# Altium PCB eSolderControl_v3.PcbDoc
Units mm, origin at the board's own origin, x right, y up, seen from the top; angles counter-clockwise.
Board outline 74.05 x 60.21 mm, 2 copper layers (Top Layer, Bottom Layer); 45 components, 44 nets, 228 pads, 74 vias.
Unrouted connection lines stored in the file: 1.
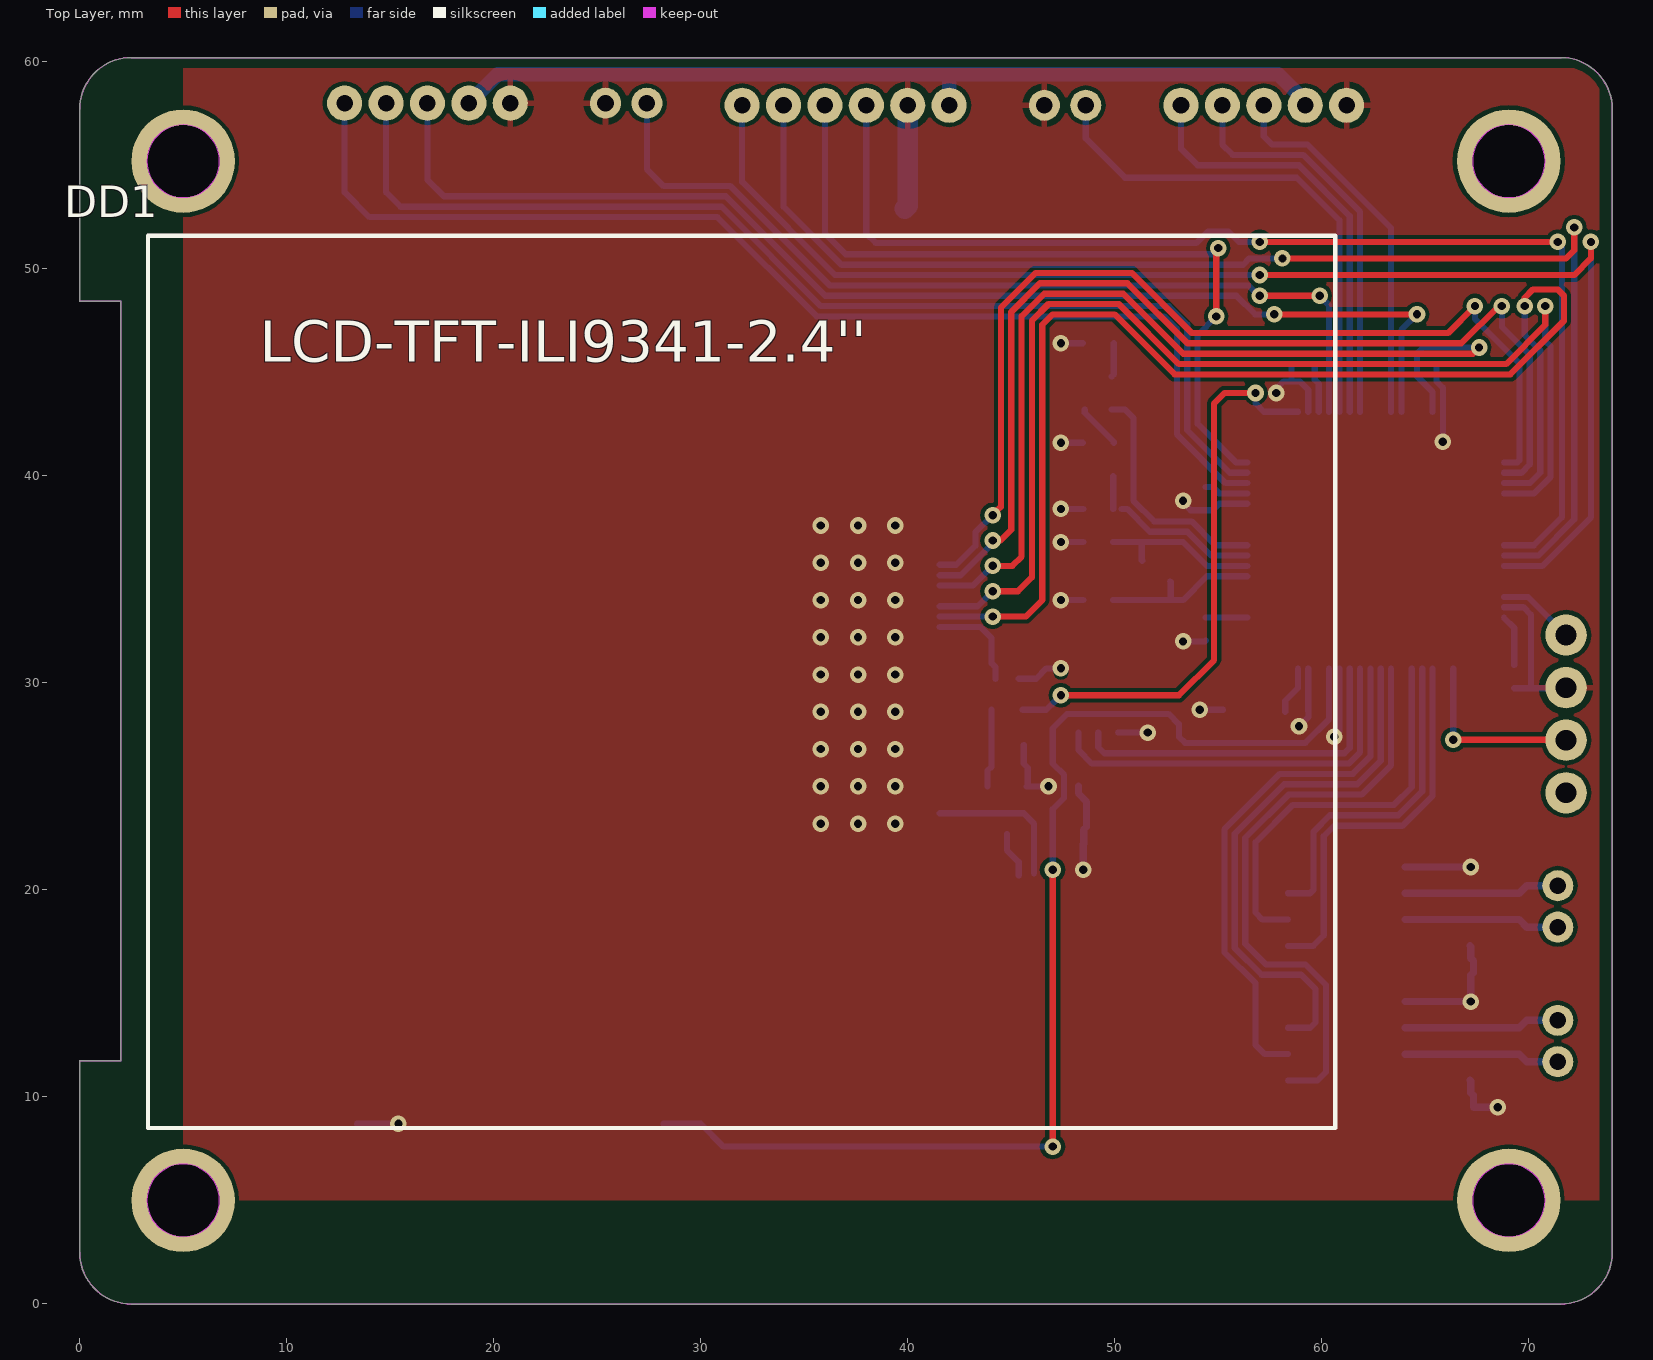
[diagram p0: Top Layer view]
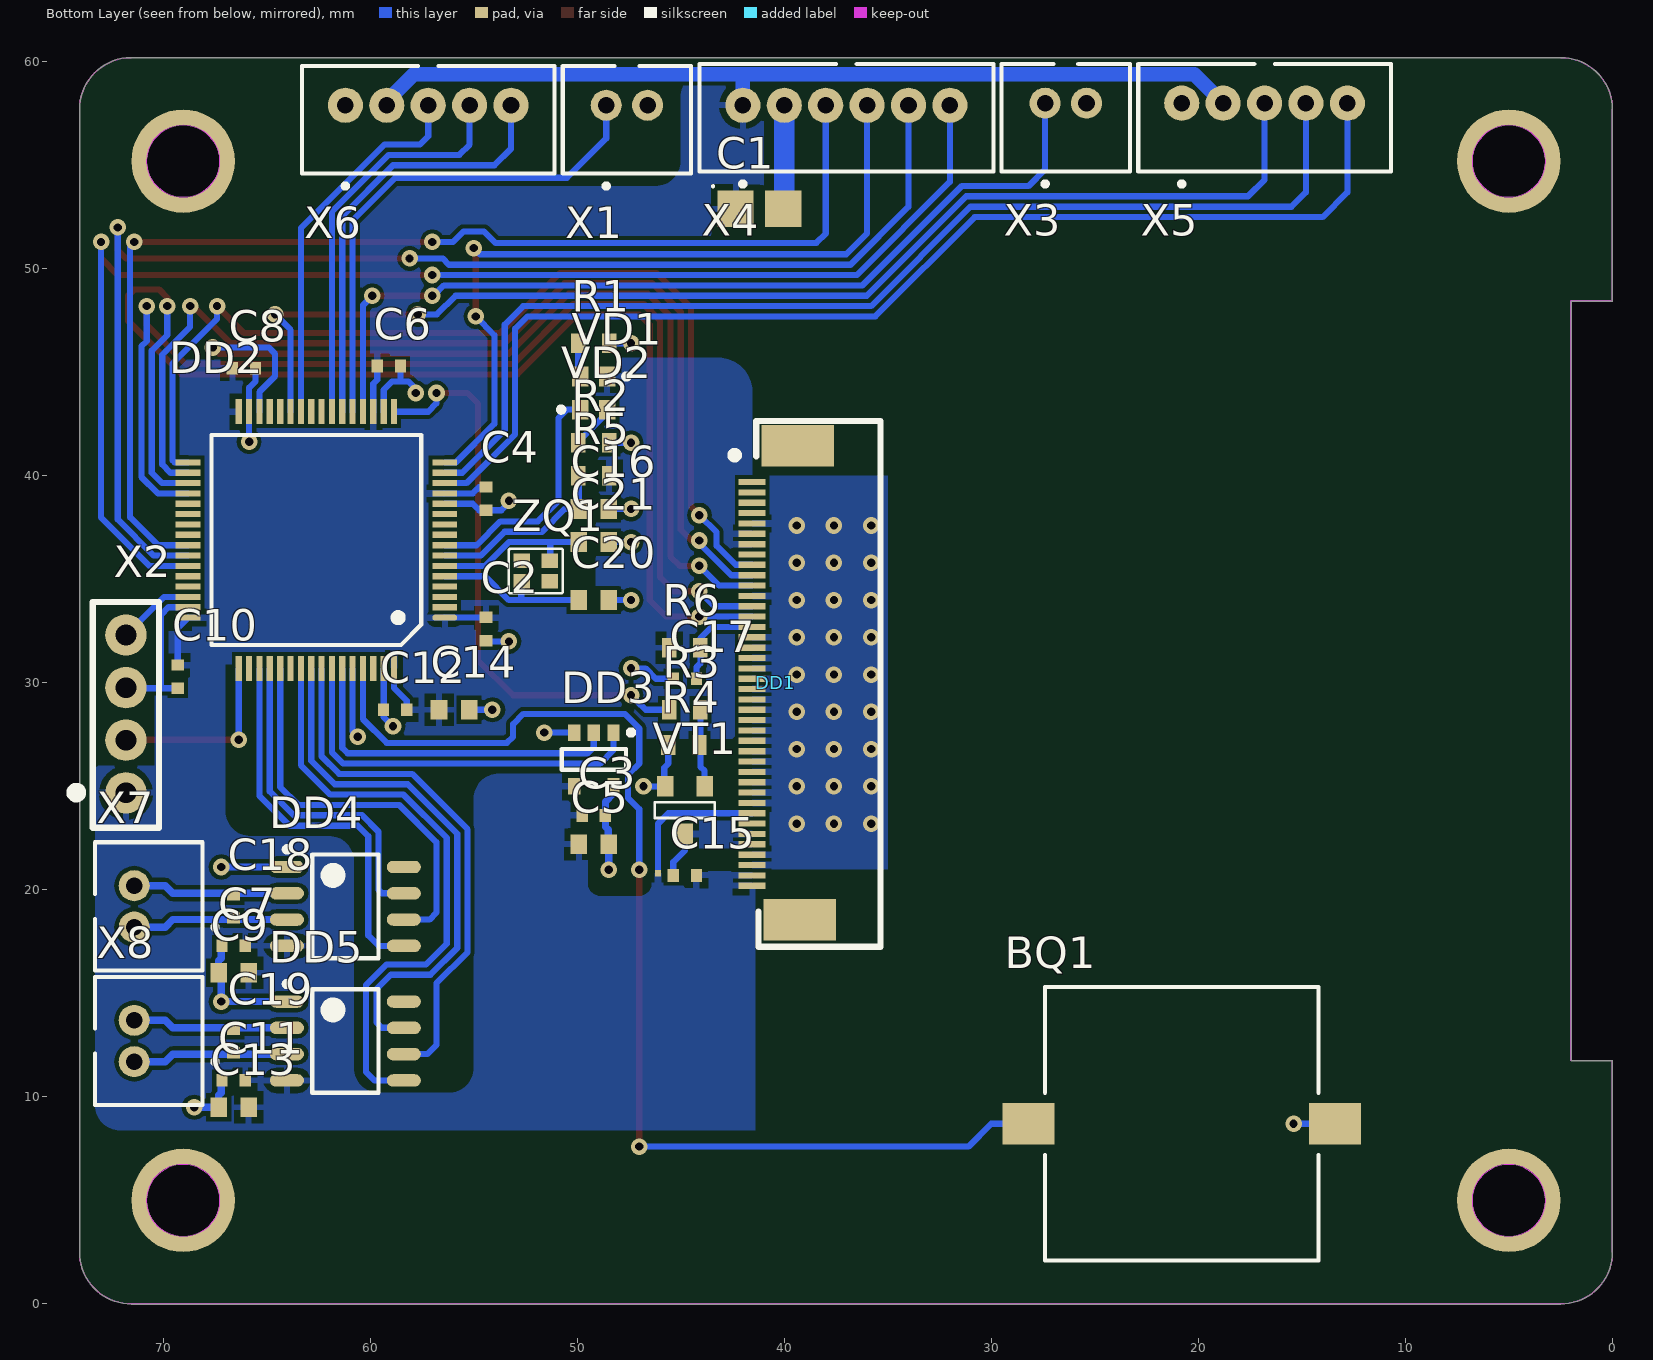
[diagram p1: Bottom Layer view, seen from below]

## Layer stack, top to bottom
Top Solder: solder mask 0.0102, Solder Resist, Dk 3.5
Top Layer: signal copper 0.0356
Dielectric 1: dielectric 0.32, FR-4, Dk 4.8
Bottom Layer: signal copper 0.0356
Bottom Solder: solder mask 0.0102, Solder Resist, Dk 3.5

## Board outline
-0.007,2.5 -0.007,11.75 cw(c0,11.75) 0,11.757 1.993,11.757 1.993,48.443 0,48.443 cw(c0,48.45) -0.007,48.45 -0.007,57.7 cw(c2.5,57.7) 2.5,60.207 71.573,60.207 cw(c71.573,60.2) 71.575,60.206 cw(c71.536,57.7) 74.043,57.7 74.043,2.5 cw(c71.536,2.5) 71.536,-0.007 2.5,-0.007 cw(c2.5,2.5)

## Design rules (kind name [scope] priority, off if disabled: settings)
BoardOutlineClearance [All] p1: gap=0.4 ignorepadtopadclearanceinfootprint=FALSE
Clearance [All] p1: gap=0.2 ignorepadtopadclearanceinfootprint=FALSE except(0.3: Arc-Arc Arc-Track Track-Track)
DiffPairsRouting [All] p1: maxlimit=0.7 minlimit=0.5 mostfreqgap=0.5 toplayer_minwidth=0.35 toplayer_maxwidth=0.5 toplayer_prefwidth=0.35 bottomlayer_minwidth=0.35 bottomlayer_maxwidth=0.5 bottomlayer_prefwidth=0.35 maxuncoupledlength=12.7
HoleSize [All] p1: absolutevalues=TRUE maxlimit=6.3 minlimit=0.3 maxpercent=80.000 minpercent=20.000
HoleToHoleClearance [All] p1: gap=0.3 allowstackedmicrovias=TRUE
PolygonConnect [All] p1: thpad.connectstyle=Relief thpad.reliefconductorwidth=0.3 thpad.reliefentries=4 thpad.polygonreliefangle="90 Angle" thpad.airgapwidth=0.3 smdpad.connectstyle=Relief smdpad.reliefconductorwidth=0.3 smdpad.reliefentries=4 smdpad.polygonreliefangle="90 Angle" smdpad.airgapwidth=0.3 via.connectstyle=Direct via.reliefconductorwidth=0.254 via.reliefentries=4 via.polygonreliefangle="90 Angle" via.airgapwidth=0.254
RoutingVias [All] p1: holewidth=0.4 width=0.8 viastyle="Through Hole" minholewidth=0.3 minwidth=0.6 maxholewidth=6.3 maxwidth=10
SilkToSilkClearance [All] p1: silktosilkclearance=0.2
SilkToSolderMaskClearance [IsPad] p1: minsilkscreentomaskgap=0.2 clearancetoexposedcopper=TRUE
SolderMaskExpansion [All] p1: expansion=0.15
Width [All] p1: maxlimit=1 minlimit=0.2 preferedwidth=0.35
25 further rules are at their usual default settings.

## Classes and differential pairs
differential pair T_SOLDER: +T_SOLDER_P -T_SOLDER_N
differential pair T_DRY: +T_DRY_P -T_DRY_N

## Components (designator, comment, footprint, x,y, rotation, side; value= is the part's Value field where it differs from the comment)
BQ1 "HPS13C" HPS13C 20.8,8.7 r90 bottom
C1 "10u" CAP_TYPE_A 41.2,52.9 r180 bottom
C2 "0.1u" C0402 54.4,32.6 r90 bottom
C3 "0.1u" C0402 49.2,23.6 r0 bottom
C4 "0.1u" C0402 54.4,38.9 r90 bottom
C5 "4.7u" C0603 49.2,22.2 r0 bottom
C6 "0.1u" C0402 59.1,45.3 r180 bottom
C7 "0.1u" C0402 66.6,17.3 r180 bottom
C8 "0.1u" C0402 66.1,45.2 r0 bottom
C9 "4.7u" C0603 66.6,16 r180 bottom
C10 "0.1u" C0402 69.3,30.3 r90 bottom
C11 "0.1u" C0402 66.6,10.8 r180 bottom
C12 "0.1u" C0402 58.8,28.7 r180 bottom
C13 "4.7u" C0603 66.6,9.5 r180 bottom
C14 "4.7u" C0603 55.952,28.7 r0 bottom
C15 "0.1u" C0402 44.8,20.7 r0 bottom
C16 "1u" C0603 49.2,38.4 r180 bottom
C17 "0.1u" C0402 44.8,30.2 r0 bottom
C18 "10n" C0402 66.6,19.2 r270 bottom
C19 "10n" C0402 66.6,12.7 r270 bottom
C20 "6p" C0603 49.2,34 r0 bottom
C21 "6p" C0603 49.2,36.8 r0 bottom
DD1 "ILI9341" ili9341-2.4'' 40.4,30 r90 top locked
DD2 "STM32F105RBTx" LQFP64 62.6,36.9 r0 bottom locked
DD3 "24AA08" SOT95P245X145-5N 49.2,26.3 r270 bottom
DD4 "MAX6675" SOIC127P600X175-8N 61.2,19.2 r180 bottom
DD5 "MAX6675" SOIC127P600X175-8N 61.2,12.7 r180 bottom
R1 "200" R0603 49.2,46.4 r180 bottom
R2 "200" R0603 49.2,41.6 r180 bottom
R3 "1K" R0603 44.8,28.7 r180 bottom
R4 "10K" R0603 44.85,27 r180 bottom
R5 "1K" R0603 49.2,40 r0 bottom
R6 "1K" R0603 44.8,31.7 r180 bottom
VD1 "*" "LED 0603_Green" 49.2,44.8 r0 bottom value="0603 green"
VD2 "*" "LED 0603_RED" 49.2,43.2 r180 bottom value=0603red
VT1 "IRLML0010" SOT23-3 44.8,23.85 r270 bottom
X1 "DS1066-02M" DS1066-02M 47.6,57.2 r180 bottom
X2 "PLS-4" PLS-4 71.8,28.5 r90 bottom
X3 "DS1066-02M" DS1066-02M 26.4,57.3 r180 bottom
X4 "DS1066-06M" DS1066-06M 37,57.3 r180 bottom
X5 "DS1066-05M" DS1066-05M 16.8,57.3 r180 bottom
X6 "DS1066-05M" DS1066-05M 57.2,57.2 r180 bottom
X7 "DS1066-02M" DS1066-02M 70.7,19.2 r90 bottom
X8 "DS1066-02M" DS1066-02M 70.7,12.7 r90 bottom
ZQ1 "24MHz" XRCGB_F_Z 52,35.4 r180 bottom

## Footprints (in the part's own frame and the unit in brackets; to place one, negate y for a bottom-side part, rotate by r counter-clockwise, add the part's x,y. Pads: shape width x height; smd on the part's side, far side on the other; paste and mask are expansions set on the pad)
C0402 [mm] "Chip Capacitor, 2-Leads, Body 1,00x0,50mm, IPC Medium Density"
  rect 0.55x0.62 smd: 1(-0.56,0) 2(0.56,0)
  body extent -0.53,-0.28 0.53,0.27, height 0.55
C0603 [mm] "Chip Capacitor, 2-Leads, Body 1,60x0,80mm, IPC Medium Density"
  rect 0.8x0.95 smd: 1(-0.725,0) 2(0.725,0)
  body extent -0.85,-0.45 0.85,0.45, height 0.9
CAP_TYPE_A [mm] "Chip Capacitor, 2-Leads, Body 3,20x1,60mm, IPC Medium Density"
  rect 1.75x1.75 smd: 1(-1.15,0) 2(1.15,0)
  silkscreen extent -2.29,1.04 -2.19,1.14, body extent -1.7,-0.9 1.7,0.9, height 1.8
DS1066-02M [mm] "step 2mm"
  round 1.5 hole 0.8 mask+0.15: 1(-1,0.7) 2(1,0.7)
  silkscreen extent -3.1,-3.3 3.1,2.6, body extent -3,-2.2 3,2.3, height 6
DS1066-05M [mm] "step 2mm"
  round 1.7 hole 0.8: 1(-4,0.7) 2(-2,0.7) 3(0,0.7) 4(2,0.7) 5(4,0.7)
  silkscreen extent -6.1,-3.3 6.1,2.6
DS1066-06M [mm] "step 2mm"
  round 1.7 hole 0.8: 1(-5,0.6) 2(-3,0.6) 3(-1,0.6) 4(1,0.6) 5(3,0.6) 6(5,0.6)
  silkscreen extent -7.1,-3.3 7.1,2.6, body extent -7,-2.1 7,2.4, height 6
HPS13C [mm]
  rect 2x2.5 smd: 1(0,7.4) 2(0,-7.4)
  silkscreen extent -6.6,-6.6 6.6,6.6, body extent -6.4,-6.4 6.4,6.4, height 2.5
ili9341-2.4'' [mm] "ili9341-40pin"
  rect 2x3.5 smd far side: 0(-11.45,1.15) 0(11.45,1.05)
  rect 0.3x1.3 smd far side: 1(9.7,-1.15) 2(9.2,-1.15) 3(8.7,-1.15) 4(8.2,-1.15) 5(7.7,-1.15) 6(7.2,-1.15) 7(6.7,-1.15) 8(6.2,-1.15) 9(5.7,-1.15) 10(5.2,-1.15) 11(4.7,-1.15) 12(4.2,-1.15) 13(3.7,-1.15) 14(3.2,-1.15) 15(2.7,-1.15) 16(2.2,-1.15) 17(1.7,-1.15) 18(1.2,-1.15) 19(0.7,-1.15) 20(0.2,-1.15) 21(-0.3,-1.15) 22(-0.8,-1.15) 23(-1.3,-1.15) 24(-1.8,-1.15) 25(-2.3,-1.15) 26(-2.8,-1.15) 27(-3.3,-1.15) 28(-3.8,-1.15) 29(-4.3,-1.15) 30(-4.8,-1.15) 31(-5.3,-1.15) 32(-5.8,-1.15) 33(-6.3,-1.15) 34(-6.8,-1.15) 35(-7.3,-1.15) 36(-7.8,-1.15) 37(-8.3,-1.15) 38(-8.8,-1.15) 39(-9.3,-1.15) 40(-9.8,-1.15)
  silkscreen extent -21.5,-20.25 21.6,37.1, body extent -21.3,-20.1 21.4,41.3, height 3.45
"LED 0603_Green" [mm] "Chip LED, 2-Leads, Body 1,60x0,85mm, IPC Medium Density"
  rect 0.8x0.95 smd: 1(-0.65,0) 2(0.65,0)
  silkscreen extent -1.67,-0.1 -1.48,0.1, body extent -0.8,-0.4 0.8,0.4, height 0.6
"LED 0603_RED" [mm] "Chip LED, 2-Leads, Body 1,60x0,85mm, IPC Medium Density"
  rect 0.8x0.95 smd: 1(-0.65,0) 2(0.65,0)
  silkscreen extent -1.68,-0.1 -1.48,0.1, body extent -0.8,-0.4 0.8,0.4, height 0.6
LQFP64 [mm]
  oval 1.2x0.3 smd: 1(-6.2,3.75)
  rect 1.2x0.3 smd: 2(-6.2,3.25) 3(-6.2,2.75) 4(-6.2,2.25) 5(-6.2,1.75) 6(-6.2,1.25) 7(-6.2,0.75) 8(-6.2,0.25) 9(-6.2,-0.25) 10(-6.2,-0.75) 11(-6.2,-1.25) 12(-6.2,-1.75) 13(-6.2,-2.25) 14(-6.2,-2.75) 15(-6.2,-3.25) 16(-6.2,-3.75) 33(6.2,-3.75) 34(6.2,-3.25) 35(6.2,-2.75) 36(6.2,-2.25) 37(6.2,-1.75) 38(6.2,-1.25) 39(6.2,-0.75) 40(6.2,-0.25) 41(6.2,0.25) 42(6.2,0.75) 43(6.2,1.25) 44(6.2,1.75) 45(6.2,2.25) 46(6.2,2.75) 47(6.2,3.25) 48(6.2,3.75)
  rect 0.3x1.2 smd: 17(-3.75,-6.2) 18(-3.25,-6.2) 19(-2.75,-6.2) 20(-2.25,-6.2) 21(-1.75,-6.2) 22(-1.25,-6.2) 23(-0.75,-6.2) 24(-0.25,-6.2) 25(0.25,-6.2) 26(0.75,-6.2) 27(1.25,-6.2) 28(1.75,-6.2) 29(2.25,-6.2) 30(2.75,-6.2) 31(3.25,-6.2) 32(3.75,-6.2) 49(3.75,6.2) 50(3.25,6.2) 51(2.75,6.2) 52(2.25,6.2) 53(1.75,6.2) 54(1.25,6.2) 55(0.75,6.2) 56(0.25,6.2) 57(-0.25,6.2) 58(-0.75,6.2) 59(-1.25,6.2) 60(-1.75,6.2) 61(-2.25,6.2) 62(-2.75,6.2) 63(-3.25,6.2) 64(-3.75,6.2)
  silkscreen extent -5.06,-5.06 5.06,5.06, body extent -6,-6 6,6, height 1.6
PLS-4 [mm] "PLS 2.54mm pitch"
  round 2 hole 1: 1(-3.81,0) 2(-1.27,0) 3(1.27,0) 4(3.81,0)
  silkscreen extent -5.5,-1.6 5.4,2.62, body extent -5.08,-1.27 5.08,1.27, height 8.44
R0603 [mm] "Chip Resistor, 2-Leads, Body 1,60x0,85mm, IPC Medium Density"
  rect 0.7x0.95 smd: 1(-0.75,0) 2(0.75,0)
  body extent -0.8,-0.4 0.8,0.4, height 0.4
SOIC127P600X175-8N [mm] "SOIC, 8-Leads, Body 4,90x3,90mm, Pitch 1,27mm, IPC Medium Density"
  oval 1.65x0.6 smd: 1(-2.825,1.905) 2(-2.825,0.635) 3(-2.825,-0.635) 4(-2.825,-1.905) 5(2.825,-1.905) 6(2.825,-0.635) 7(2.825,0.635) 8(2.825,1.905)
  silkscreen extent -2.95,-2.5 1.6,2.88, body extent -3,-2.45 3,2.45, height 1.7
SOT23-3 [mm] "SOT23, 3 pin"
  round 0.5 on Mech16: 0(0,0)
  rect 1x0.8 smd: 1(-1.15,0.95) 2(-1.15,-0.95) 3(1.15,0)
  silkscreen extent -0.38,-1.45 0.38,1.45, body extent -1.4,-1.45 1.4,1.45, height 1.29
SOT95P245X145-5N [mm] "SOT23, 5-Leads, Body 2,90x2,45mm, Pitch 0,95mm, IPC Medium Density"
  rect 0.8x0.6 smd: 1(-1.3,0.95) 2(-1.3,0) 3(-1.3,-0.95) 4(1.3,-0.95) 5(1.3,0.95)
  silkscreen extent -1.42,-1.55 0.5,1.92, body extent -1.25,-1.5 1.25,1.5, height 1.05
XRCGB_F_Z [mm] "smd 2x1.6 mm crystal resonator"
  rect 0.8x0.7 smd: 1(-0.675,-0.5) 2(0.675,-0.5) 3(0.675,0.5) 4(-0.675,0.5)
  silkscreen extent -1.3,-1.07 1.3,1.07, body extent -1,-0.8 1,0.8, height 0.65

## Part data
BQ1: library part Buzzer, Name=HPS13C
C1: library part Capasitor(Pol), Name="TECAP 10/10V"
C2 C3 C4 C5 C6 C7 C8 C9 C10 C11 C12 C13 C14 C15 C16 C17 C18 C19 C20 C21: library part Capasitor
  C16 C17: Other=Космодром
  C20 C21: Other=Алиэкспрес
DD1: library part ili9341
DD3: "8K I2C Serial EEPROM", Name=24AA08
DD4 DD5: library part MAX31855/6675, Name=MAX6675
R1 R2 R3 R4 R5 R6: library part Resistor
VD1 VD2: library part LED
VT1: library part "N-channel MOSFET", "N-channel MOSFET", Name=IRLML0010
X1 X3 X7 X8: library part 2-PIN, Name=DS1066-02M
X2: library part 4-PIN, Name=PLS-4
X4: library part 6-PIN, Name=DS1066-06M
X5 X6: library part 5-PIN, Name=DS1066-05M
ZQ1: library part Resonator, Name=XRCGB_F_Z
DD2: Name=STM32F105RBTx

## Free pads (board coordinates)
  round 5 hole 3.5: 0(5,5) 0(5,55.2) 0(69.036,5) 0(69.036,55.2)
  rect 0.3x0.3 smd far side: 4(46.1,20.8)

## Via types
v1: diameter 0.8, hole 0.4, Top Layer to Bottom Layer, tented both sides, 57 vias
v2: diameter 0.8, hole 0.4, Top Layer to Bottom Layer, 17 vias

## Nets (pads, with @x,y where several pads share a name; then routed paths per layer and width w, separated by ;. In a path a pad name is that pad's centre, name@x,y a point inside that pad or via, vN(x,y) a via of type N, cw(c..) or ccw(c..) an arc to the next point about the centre after c; other vN are vias at no path point)
3.3V: C1.1 C2.2 C3.2 C4.2 C5.2 C6.1 C7.2 C8.2 C9.2 C10.2 C11.2 C12.2 C13.2 C14.2 C15.1 DD1.6 DD1.7 DD1.33 DD1.39 DD1.40 DD2.1 DD2.13 DD2.19 DD2.32 DD2.48 DD2.64 DD3.4 DD4.4 DD5.4 pad.4 R5.1 R6.1 VD1.1 X2.1 X4.1 X5.2 X6.2 | length 61.6
  Bottom Layer w0.3: DD1.33 45.6,23.7 46.1,23.2 pad.4 ; C2.2 54.41,33.15 DD2.1 ; C4.2 54.74,39.46 55.05,39.15 DD2.13 ; C12.2@58.24,28.6 C12.2 58.24,29.14 58.85,29.75 DD2.64 ; C6.1 59.66,44.64 59.85,44.45 DD2.19 ; DD2.48 69.3,32.65 C10.2
  Bottom Layer w0.7: X5.2 20.2,59.4 42,59.4 ; X4.1 42,59.4 ; X6.2 59.2,58.1 57.9,59.4 42,59.4
dryControl: DD2.42 X4.5 | length 63.8
  Top Layer w0.3: v1(58.1,50.5) 71.8,50.5 72.2,50.9 v1(72.2,52)
  Bottom Layer w0.3: X4.5@34,57.8 34,53 36.8,50.2 56.2,50.2 56.5,50.5 v1(58.1,50.5) ; DD2.42 70.457,36.15 72.2,37.893 v1(72.2,52)
dryFanPWM: DD2.16 X4.4 | length 37.7
  Top Layer w0.3: v1(54.9,47.7) 54.9,50.9 v1(55,51)
  Bottom Layer w0.3: X4.4@36,57.8 36,51.707 37.007,50.7 54.7,50.7 v1(55,51) ; v1(54.9,47.7) 54,46.8 54,42.507 55.857,40.65 DD2.16
dryReed: DD2.20 X3.1 | length 43.9
  Top Layer w0.3: v2(57,48.7) v2(59.9,48.7)
  Bottom Layer w0.3: X3.1@27.4,57.9 27.4,54.8 28.2,54 31.421,54 36.221,49.2 56.439,49.2 v2@56.939,48.7 ; v2(59.9,48.7) 60.35,48.25 DD2.20
EEPROM_SCL: DD2.58 DD3.1 | length 19
  Bottom Layer w0.3: DD3.1 48.25,26.75 48.9,26.1 61.3,26.1 61.85,26.65 DD2.58
EEPROM_SDA: DD2.59 DD3.2 | length 16.9
  Bottom Layer w0.3: DD3.2 49.2,26.9 49.5,26.6 61.093,26.6 61.35,26.857 DD2.59
EncDry_A: DD2.14 X5.5 | length 56.6
  Bottom Layer w0.3: X5.5@12.8,57.9 12.8,53.7 14,52.5 30.8,52.5 35.6,47.7 52.4,47.7 53,47.1 53,42 55.35,39.65 DD2.14
EncDry_B: DD2.15 X5.4 | length 54.4
  Bottom Layer w0.3: X5.4@14.8,57.9 14.8,53.7 15.5,53 31.007,53 35.807,48.2 52.607,48.2 53.5,47.307 53.5,42.207 55.557,40.15 DD2.15
EncDry_Button: DD2.27 X5.3 | length 59.1
  Top Layer w0.3: v1(57.7,47.8) v1(64.6,47.8)
  Bottom Layer w0.3: X5.3@16.8,57.9 16.8,54.3 17.6,53.5 31.214,53.5 36.014,48.7 55.879,48.7 56.779,47.8 v1@57.7,47.8 ; DD2.27 63.85,47.05 v1(64.6,47.8)
EncSolder_A: DD2.22 X6.5 | length 21
  Bottom Layer w0.3: X6.5 53.2,55.8 54,55 58.9,55 61.35,52.55 DD2.22
EncSolder_B: DD2.23 X6.4 | length 19.6
  Bottom Layer w0.3: X6.4 55.2,56 55.7,55.5 59.107,55.5 61.85,52.757 DD2.23
EncSolder_Button: DD2.26 X6.3 | length 18.4
  Bottom Layer w0.3: X6.3 57.2,56.4 57.6,56 59.314,56 63.35,51.964 DD2.26
GND: BQ1.2 C1.2 C2.1 C3.1 C4.1 C5.1 C6.2 C7.1 C8.1 C9.1 C10.1 C11.1 C12.1 C13.1 C14.1 C16.2 C17.2 C20.1 C21.1 DD1.5 DD1.12 DD1.16 DD1.17 DD1.18 DD1.19 DD1.20 DD1.21 DD1.22 DD1.23 DD1.24 DD1.25 DD1.26 DD1.27 DD1.28 DD1.29 DD1.30 DD1.31 DD1.32 DD1.37 DD1.38 DD2.12 DD2.18 DD2.31 DD2.47 DD2.60 DD2.63 DD3.3 DD3.5 DD4.1 DD5.1 R1.2 R2.2 R4.1 VT1.2 X1.2 X2.3 X3.2 X4.2 X5.1 X6.1 | length 62.7
  Top Layer w0.3: v2@47.4,30.5 v2(47.4,30.7)
  Bottom Layer w0.3: BQ1.2 v2(15.4,8.7) ; C17.2 46.2,30.2 46.7,30.7 v2(47.4,30.7) ; R4.1 45.6,26.1 45.8,25.9 45.8,25.05 VT1.2 v2(46.8,25) ; v1@47.3,41.6 v1(47.4,41.6) R2.2 ; v1(47.4,34) C20.1 ; v1(47.4,36.8) C21.1 ; v1(47.4,38.4) C16.2 ; v1(47.4,46.4) R1.2 ; DD3.3 v2(51.6,27.6) ; v1(53.3,32) 54.36,32 C2.1 ; v1(53.3,38.8) 53.3,38.7 53.66,38.34 C4.1 54.74,38.34 55.05,38.65 DD2.12 ; v2(54.1,28.7) C14.1 ; v1(57.8,44) 57.8,44.2 58.16,44.56 58.94,44.56 59.35,44.15 DD2.18 ; 58.54,44.64 C6.2 ; v2(58.9,27.9) 59.36,28.36 C12.1@59.36,28.6 ; DD2.63 59.35,28.61 C12.1@59.36,28.6 ; C12.1 C12.1@59.36,28.6 ; v2(60.6,27.4) 60.85,27.65 DD2.60 ; C8.1 65.54,44.567 65.85,44.257 DD2.31 v2(65.85,41.65) ; DD2.47 69.75,33.65 70.1,33.3 70.1,29.74 ; C10.1 70.1,29.74 ; X2.3 71.77,29.74 70.1,29.74
  Bottom Layer w0.35: DD3.5 48.25,24.65 48.64,24.26 C3.1 48.64,23.04 48.5,22.9 48.5,22.225 C5.1 v2(48.475,20.975) ; DD5.1 v1(67.195,14.605) 67.195,15.87 C9.1 67.325,16.575 67.2,16.7 67.2,17.26 C7.1 ; DD4.1 v1(67.195,21.105) ; C11.1 67.2,10.76 67.2,10.2 67.325,10.075 C13.1 v2(68.5,9.5)
  Bottom Layer w1: C1.2@39.85,52.9 40,53.05 X4.2
  other v1: 35.8,23.2 37.6,23.2 39.4,23.2 35.8,25 37.6,25 39.4,25 35.8,26.8 37.6,26.8 39.4,26.8 35.8,28.6 37.6,28.6 39.4,28.6 35.8,30.4 37.6,30.4 39.4,30.4 35.8,32.2 37.6,32.2 39.4,32.2 35.8,34 37.6,34 39.4,34 35.8,35.8 37.6,35.8 39.4,35.8 35.8,37.6 37.6,37.6 39.4,37.6
LCD_Backlight: C15.2 DD1.34 DD1.35 DD1.36 VT1.3 | length 2.2
  Bottom Layer w0.3: VT1.3 44.8,21.9 45.36,21.34 C15.2
LCD_Backlight_Control: DD2.17 R3.1 | length 27.8
  Top Layer w0.3: v2(47.4,29.4) 53.1,29.4 54.8,31.1 54.8,43.5 55.3,44 v2(56.8,44) ; v2@56.6,43.9 v2@56.8,43.9
  Bottom Layer w0.3: R3.1 46.693,28.7 47.093,29.1 47.1,29.1 v2(47.4,29.4) ; v2(56.8,44) 56.8,43.5 57.2,43.1 DD2.17
LCD_DCX: DD1.11 DD2.30 | length 46.3
  Top Layer w0.3: v1(44.1,35.65) 45.05,35.65 45.5,36.1 45.5,47.707 46.593,48.8 50.407,48.8 53.307,45.9 67.3,45.9 v1(67.6,46.2)
  Bottom Layer w0.3: DD1.11 43.15,34.7 v1(44.1,35.65) ; DD2.30 65.35,44.05 64.6,44.8 64.6,45.9 64.9,46.2 v1(67.6,46.2)
LCD_RST: C17.1 DD1.15 R6.2 | length 4.8
  Bottom Layer w0.3: DD1.15 43.5,32.7 44.05,32.15 R6.2 44.05,30.95 44.24,30.76 C17.1
LCD_SPI_CS: DD1.9 DD2.33 | length 48.6
  Top Layer w0.3: v1(44.1,38.1) 44.5,38.5 44.5,48.121 46.179,49.8 50.821,49.8 53.721,46.9 66.1,46.9 v1(67.4,48.2)
  Bottom Layer w0.3: DD1.9 42.345,35.7 43.272,36.628 43.272,37.272 v1(44.1,38.1) ; v1(67.4,48.2) 67.4,47.579 69.55,45.429 69.55,40.757 69.443,40.65 DD2.33
LCD_SPI_MISO: DD1.14 DD2.35 | length 60.4
  Top Layer w0.3: v1(44.1,33.2) 45.7,33.2 46.5,34 46.5,47.293 47.007,47.8 49.993,47.8 52.893,44.9 69.107,44.9 71.7,47.493 71.7,48.7 71.4,49 70.2,49 69.8,48.6 v1(69.8,48.2)
  Bottom Layer w0.3: DD1.14 v1(44.1,33.2) ; DD2.35 70.05,39.65 70.55,40.15 70.55,46.05 69.8,46.8 v1(69.8,48.2)
LCD_SPI_MOSI: DD1.13 DD2.36 | length 56.4
  Top Layer w0.3: v1(44.1,34.425) 45.325,34.425 46,35.1 46,47.5 46.8,48.3 50.2,48.3 53.1,45.4 68.9,45.4 70.8,47.3 v1(70.8,48.2)
  Bottom Layer w0.3: DD1.13 43.375,33.7 v1(44.1,34.425) ; DD2.36 70.257,39.15 71.05,39.943 71.05,46.257 70.8,46.507 v1(70.8,48.2)
LCD_SPI_SCK: DD1.10 DD2.34 | length 50.8
  Top Layer w0.3: v1(44.1,36.875) 44.475,36.875 45,37.4 45,47.914 46.386,49.3 50.614,49.3 53.514,46.4 66.739,46.4 68.539,48.2 v1(68.7,48.2)
  Bottom Layer w0.3: DD1.10 42.552,35.2 44.1,36.748 v1(44.1,36.875) ; v1(68.7,48.2) 68.7,47.193 70.05,45.843 70.05,40.55 69.65,40.15 DD2.34
LED: DD2.8 VD2.1 | length 11.6
  Bottom Layer w0.3: VD2.1 50.5,43.2 50.9,42.8 50.9,38.807 51.907,37.8 52.4,37.8 53.714,37.8 54.864,36.65 DD2.8
MCU_OSC_IN: C20.2 DD2.5 ZQ1.1 | length 7.9
  Bottom Layer w0.3: C20.2 52.7,34 ; ZQ1.1 52.7,34.875 52.7,34 ; DD2.5 54.45,35.15 53.3,34 52.7,34
MCU_OSC_OUT: C21.2 DD2.6 ZQ1.3 | length 7.9
  Bottom Layer w0.3: C21.2 51.3,36.8 ; ZQ1.3 51.3,35.925 51.3,36.8 ; DD2.6 54.45,35.65 53.3,36.8 51.3,36.8
MCU_RST: C16.1 DD2.7 R5.2 | length 8.6
  Bottom Layer w0.3: C16.1 R5.2@49.925,39.975 ; C16.1@50.325,38.4 50.6,38.4 51.7,37.3 53.507,37.3 54.657,36.15 DD2.7
NetR1_1: R1.1 VD1.2 | length 1.6
  Bottom Layer w0.3: VD1.2 49.95,44.9 R1.1
NetR2_1: R2.1 VD2.2 | length 2.2
  Bottom Layer w0.3: VD2.2 48.55,43.05 49.95,41.65 R2.1
NetR3_2: R3.2 R4.2 VT1.1 | length 3.8
  Bottom Layer w0.3: VT1.1 43.85,25.75 44.05,25.95 R3.2
solderControl: DD2.43 X4.6 | length 66.5
  Top Layer w0.3: v1(57,49.7) 72.2,49.7 73,50.5 v1(73,51.3) v1@73,51.5
  Bottom Layer w0.3: X4.6@32,57.8 32,54.2 36.5,49.7 v1(57,49.7) ; DD2.43 70.664,35.65 73,37.986 v1(73,51.3) v1@73,51.5
solderVibro: DD2.21 X1.1 | length 24.7
  Bottom Layer w0.3: X1.1 48.6,56.3 50.5,54.4 58.793,54.4 60.85,52.343 DD2.21
speaker: BQ1.1 DD2.61 | length 57.4
  Top Layer w0.3: v2@46.9,7.6 47,7.7 v2(47,20.975)
  Bottom Layer w0.3: BQ1.1 30,8.7 31.1,7.6 v2@46.9,7.6 ; v2(47,20.975) 47,23.9 47.55,24.45 47.55,25.55 47,26.1 47,27.8 47.7,28.5 52.6,28.5 53.1,28 53.1,27.4 53.4,27.1 59.2,27.1 60.35,28.25 DD2.61
  other v2: 47,7.6
SWDCLK: DD2.49 X2.2 | length 8.9
  Top Layer w0.3: v2(66.35,27.25) 71.78,27.25 X2.2
  Bottom Layer w0.3: v2(66.35,27.25) DD2.49
SWDIO: DD2.46 X2.4 | length 3.8
  Bottom Layer w0.3: DD2.46 69.96,34.15 X2.4
T_DRY_N: C18.1 DD4.2 X7.2 | length 7.5
  Bottom Layer w0.35: DD4.2 69.535,19.835 69.9,20.2 X7.2
T_DRY_P: C18.2 DD4.3 X7.1 | length 7.5
  Bottom Layer w0.35: DD4.3 69.535,18.565 69.9,18.2 X7.1
T_SOLDER_N: C19.1 DD5.2 X8.2 | length 7.5
  Bottom Layer w0.35: DD5.2 69.535,13.335 69.9,13.7 X8.2
T_SOLDER_P: C19.2 DD5.3 X8.1 | length 7.5
  Bottom Layer w0.35: DD5.3 69.535,12.065 69.9,11.7 X8.1
tempDry_SPI_CS: DD2.53 DD4.6 | length 19.5
  Bottom Layer w0.3: DD4.6 57.135,18.565 56.8,18.9 56.8,22.3 58.6,24.1 63.486,24.1 64.35,24.964 DD2.53
tempDry_SPI_SCK: DD2.51 DD4.5 | length 18.9
  Bottom Layer w0.3: DD4.5 59.595,17.295 60.1,17.8 60.1,22.6 60.6,23.1 63.9,23.1 65.35,24.55 DD2.51
tempDry_SPI_SO: DD2.52 DD4.7 | length 16.1
  Bottom Layer w0.3: DD4.7 59.435,19.835 59.6,20 59.6,22.807 60.393,23.6 63.693,23.6 64.85,24.757 DD2.52
tempSolder_SPI_CS: DD2.57 DD5.6 | length 25.6
  Bottom Layer w0.3: DD5.6 57.235,12.065 56.8,12.5 56.8,15.486 55.3,16.986 55.3,22.921 57.979,25.6 61.507,25.6 62.35,26.443 DD2.57
tempSolder_SPI_SCK: DD2.55 DD5.5 | length 29.2
  Bottom Layer w0.3: DD5.5 59.795,10.795 60.2,11.2 60.2,15.407 59.207,16.4 57.3,16.4 56.3,17.4 56.3,22.507 58.393,24.6 61.921,24.6 63.35,26.029 DD2.55
tempSolder_SPI_SO: DD2.56 DD5.7 | length 26.3
  Bottom Layer w0.3: DD5.7 59.435,13.335 59.7,13.6 59.7,15.2 59,15.9 57.093,15.9 55.8,17.193 55.8,22.714 58.186,25.1 61.714,25.1 62.85,26.236 DD2.56
zerroCross: DD2.41 X4.3 | length 57.1
  Top Layer w0.3: v1(57,51.3) 71.2,51.3 v1@71.4,51.5
  Bottom Layer w0.3: X4.3@38,57.8 38,51.7 38.45,51.25 53.95,51.25 54.5,51.8 55.5,51.8 56,51.3 v1(57,51.3) ; DD2.41 70.25,36.65 71.6,38 71.6,51.1 v1(71.4,51.3) v1@71.4,51.5
pads on no net: DD1.0 DD1.1 DD1.2 DD1.3 DD1.4 DD1.8 DD2.2 DD2.3 DD2.4 DD2.9 DD2.10 DD2.11 DD2.24 DD2.25 DD2.28 DD2.29 DD2.37 DD2.38 DD2.39 DD2.40 DD2.44 DD2.45 DD2.50 DD2.54 DD2.62 DD4.8 DD5.8 VT1.0 ZQ1.2 ZQ1.4

## Polygon pours and split planes (outlines as drawn)
GND on Top Layer "GND_L01_P000" (solid, pour order 0): 73.306,8.5 59.4,8.5 59.4,23.1 73.4,23.1
GND on Top Layer "GND_L01_P006" (solid, pour order 6): 55.4,44.5 69,44.5 69,29.6 55.4,29.6
GND on Top Layer "Bottom Layer-No Net" (solid, pour order 20): 5,59.7 73.4,59.7 73.4,5 5,5
3.3V on Bottom Layer "Bottom Layer-No Net" (solid, pour order 12): 42.2,59.5 43.8,59.5 cw(c43.8,58.3) 45,58.3 45,55.2 ccw(c46.2,55.2) 46.2,54 58.8,54 60.5,52.3 60.5,39.7 54,39.7 54,51.6 41,51.6 41,58.3 cw(c42.2,58.3)
LCD_Backlight on Bottom Layer "Bottom Layer-No Net" (solid, pour order 24): 40.9,23.4 45.4,23.4 45.4,22 40.9,22
GND on Bottom Layer "Bottom Layer-No Net" (solid, pour order 22): 41.9,40 41.9,21 35,21 35,40
3.3V on Bottom Layer "Bottom Layer-No Net" (solid, pour order 14): 58.545,34 58.545,27.3 41.55,27.3 41.55,44.057 cw(c43.193,44.057) 43.193,45.7 49.1,45.7 49.1,34
3.3V on Bottom Layer "Bottom Layer-No Net" (solid, pour order 18): 58,8.4 41.4,8.4 41.4,20.9 46.4,20.9 46.4,20.3 ccw(c47,20.3) 47,19.7 48.9,19.7 ccw(c48.9,20.3) 49.5,20.3 49.5,24.7 49.5,25.6 53.8,25.6 cw(c53.8,24.4) 55,24.4 55,11.4 ccw(c56.2,11.4) 56.2,10.2 58,10.2
3.3V on Bottom Layer "3.3V_L02_P004" (solid, pour order 4): 68.6,42.9 68.6,30.9 56.6,30.9 56.6,42.9
3.3V on Bottom Layer "Bottom Layer-No Net" (solid, pour order 8): 66.1,45.6 68.9,45.6 69.3,45.2 69.3,41 66.1,41
3.3V on Bottom Layer "Bottom Layer-No Net" (solid, remove dead copper, pour order 16): 67,31.508 68,32.508 70.4,32.5 70.4,26 73.084,26 cw(c73.012,25.73) 73.282,25.658 73.282,9.582 cw(c72.1,9.582) 72.1,8.4 57.5,8.4 57.5,10.2 59.6,10.2 ccw(c59.6,11.4) 60.8,11.4 60.8,21.4 cw(c62,21.4) 62,22.6 65.8,22.6 ccw(c65.8,23.8) 67,23.8

## Keep-outs
Keep-Out Layer:
  circle w0.013: c69.036,5 r1.75
  circle w0.013: c69.036,55.2 r1.75
  circle w0.013: c5,55.2 r1.75
  circle w0.013: c5,5 r1.75
  lines w0.013: 0,2.5 ccw(c2.5,2.5) 2.5,0 ; 0,2.5 ccw(c2.5,2.5) 2.5,0 ; 0,2.5 0,11.75 ; 0,2.5 0,11.75 ; 0,11.75 2,11.75 ; 0,48.45 2,48.45 ; 0,48.45 0,51.45 ; 0,48.45 2,48.45 ; 0,48.45 0,51.45 ; 0,51.45 0,57.7 ; 0,51.45 0,57.7 ; 0,57.7 cw(c2.5,57.7) 2.5,60.2 ; 0,57.7 cw(c2.5,57.7) 2.5,60.2 ; 2,11.75 2,48.45 ; 2,11.75 2,48.45 ; 2.5,0 71.536,0 ; 2.5,0 71.536,0 ; 2.5,60.2 71.536,60.2 ; 2.5,60.2 71.536,60.2 ; 71.536,0 ccw(c71.536,2.5) 74.036,2.5 ; 71.536,0 ccw(c71.536,2.5) 74.036,2.5 ; 71.536,60.2 cw(c71.536,57.7) 74.036,57.7 ; 71.536,60.2 cw(c71.536,57.7) 74.036,57.7 ; 71.536,60.2 71.573,60.2 71.536,60.2 ; 74.036,2.5 74.036,57.7 ; 74.036,2.5 74.036,57.7

## Other copper
Bottom Layer:
  pour cut-out: 47.875,34.612 47.963,34.7 50.5,34.7 50.5,33.35 50.525,33.325 47.875,33.325
  pour cut-out: 66.3,15.3 67.1,15.3 67.1,17.7 66.3,17.7

## Silkscreen, mask and mechanical layers (free items; w line width, h text height)
Mechanical 1:
  circle w0.1: c5,5 r1.75
  circle w0.1: c69.036,5 r1.75
  circle w0.1: c69.036,55.2 r1.75
  circle w0.1: c5,55.2 r1.75
  circle w0.013: c69.036,5 r1.75
  circle w0.013: c69.036,55.2 r1.75
  circle w0.013: c5,55.2 r1.75
  circle w0.013: c5,5 r1.75
  lines w0.013: 71.573,60.2 71.536,60.2 ; 71.536,60.2 cw(c71.536,57.7) 74.036,57.7 74.036,2.5 cw(c71.536,2.5) 71.536,0 2.5,0 cw(c2.5,2.5) 0,2.5 0,11.75 2,11.75 2,48.45 0,48.45 0,51.45 0,57.7 cw(c2.5,57.7) 2.5,60.2 71.536,60.2
lcd:
  lines w0.013: 0,8.75 0,51.45 60.3,51.45 60.3,8.75 0,8.75 ; 7.391,11.6 7.391,48.6 57.3,48.6 57.3,11.6 7.391,11.6

## Text inside footprints (layer, text, board x,y; h text height)
DD1: Top Overlay "LCD-TFT-ILI9341-2.4''" at 8.7,45.5 h2